# Altium PCB IKIU_UAV.PcbDoc
Units mm, origin at the board's own origin, x right, y up, seen from the top; angles counter-clockwise.
Board outline 69.98 x 70 mm, 2 copper layers (Top Layer, Bottom Layer); 43 components, 52 nets, 188 pads, 41 vias.
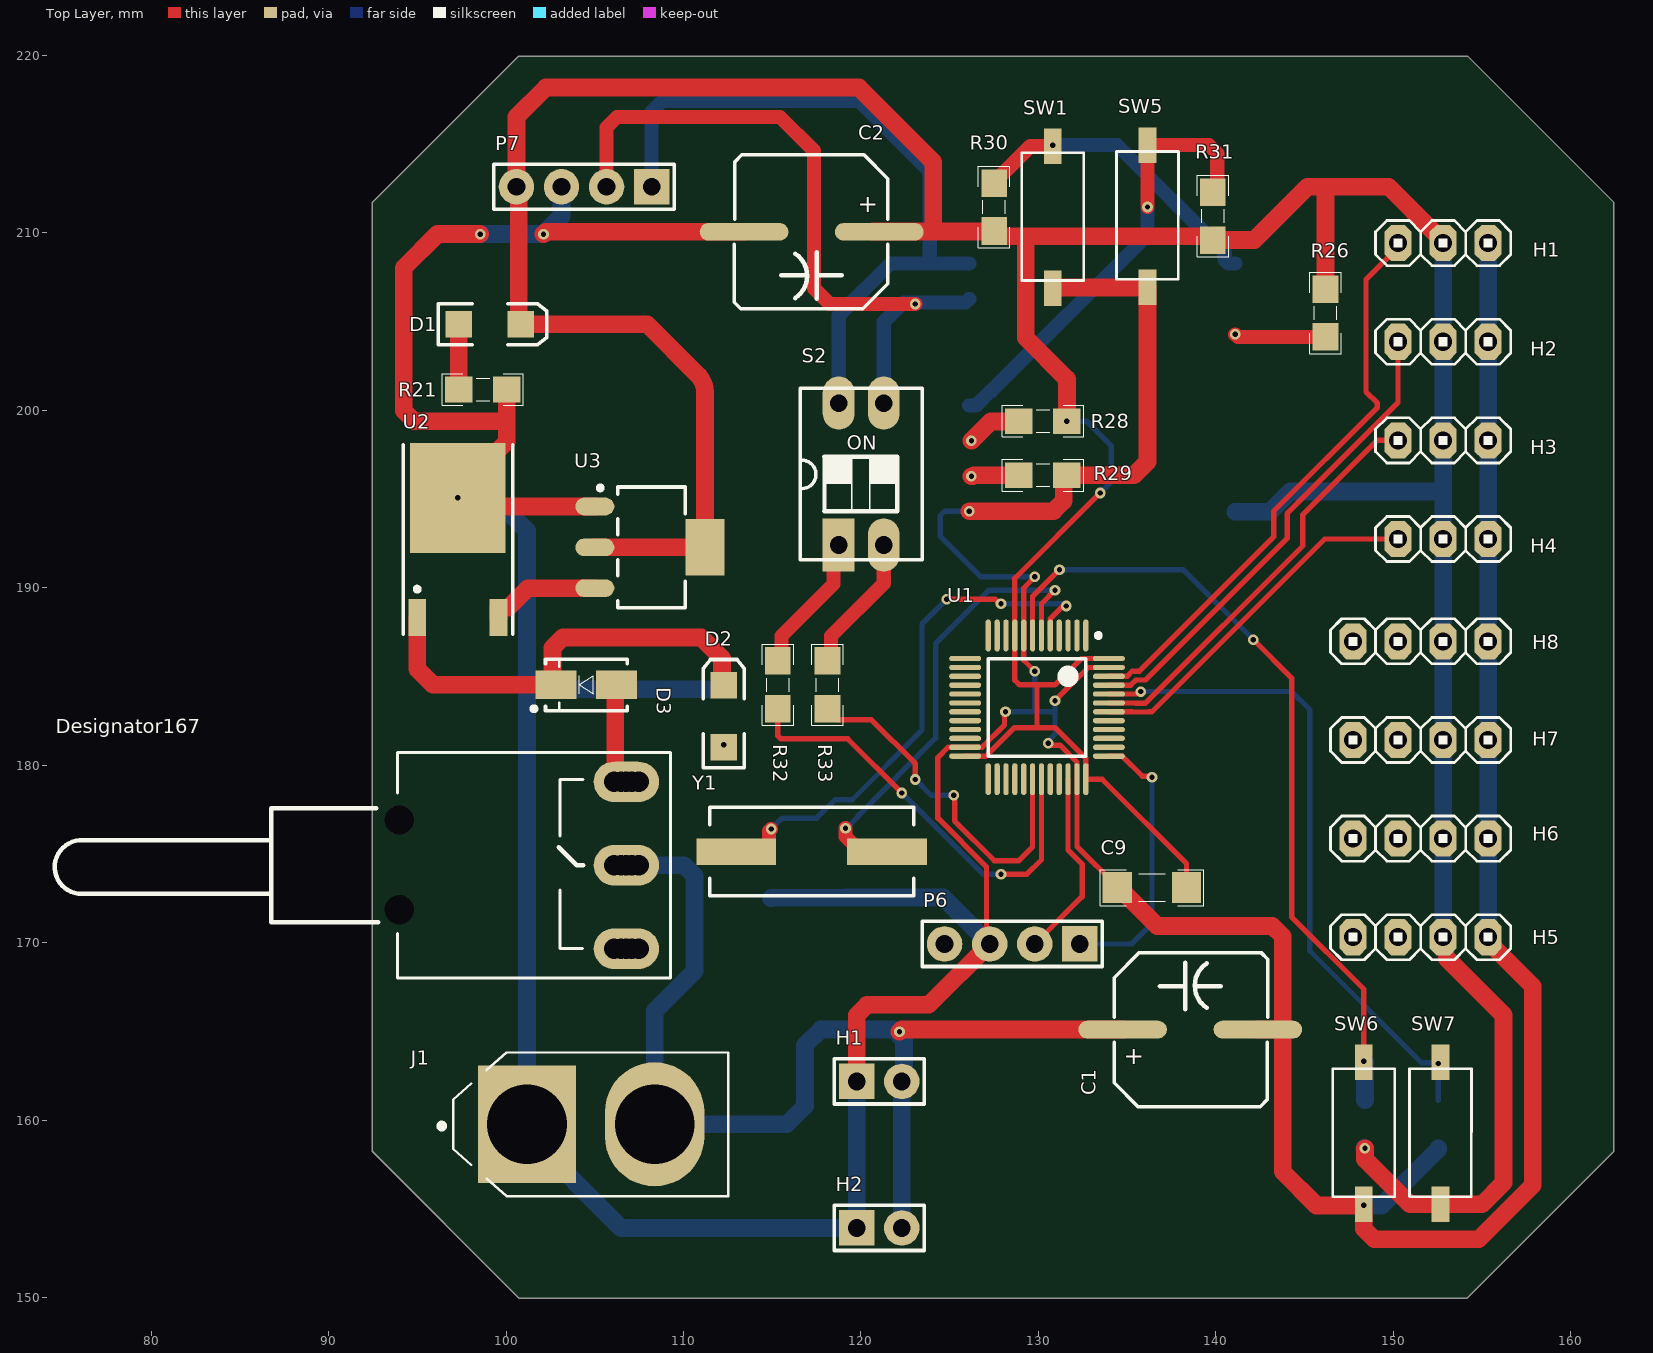
[diagram p0: Top Layer view]
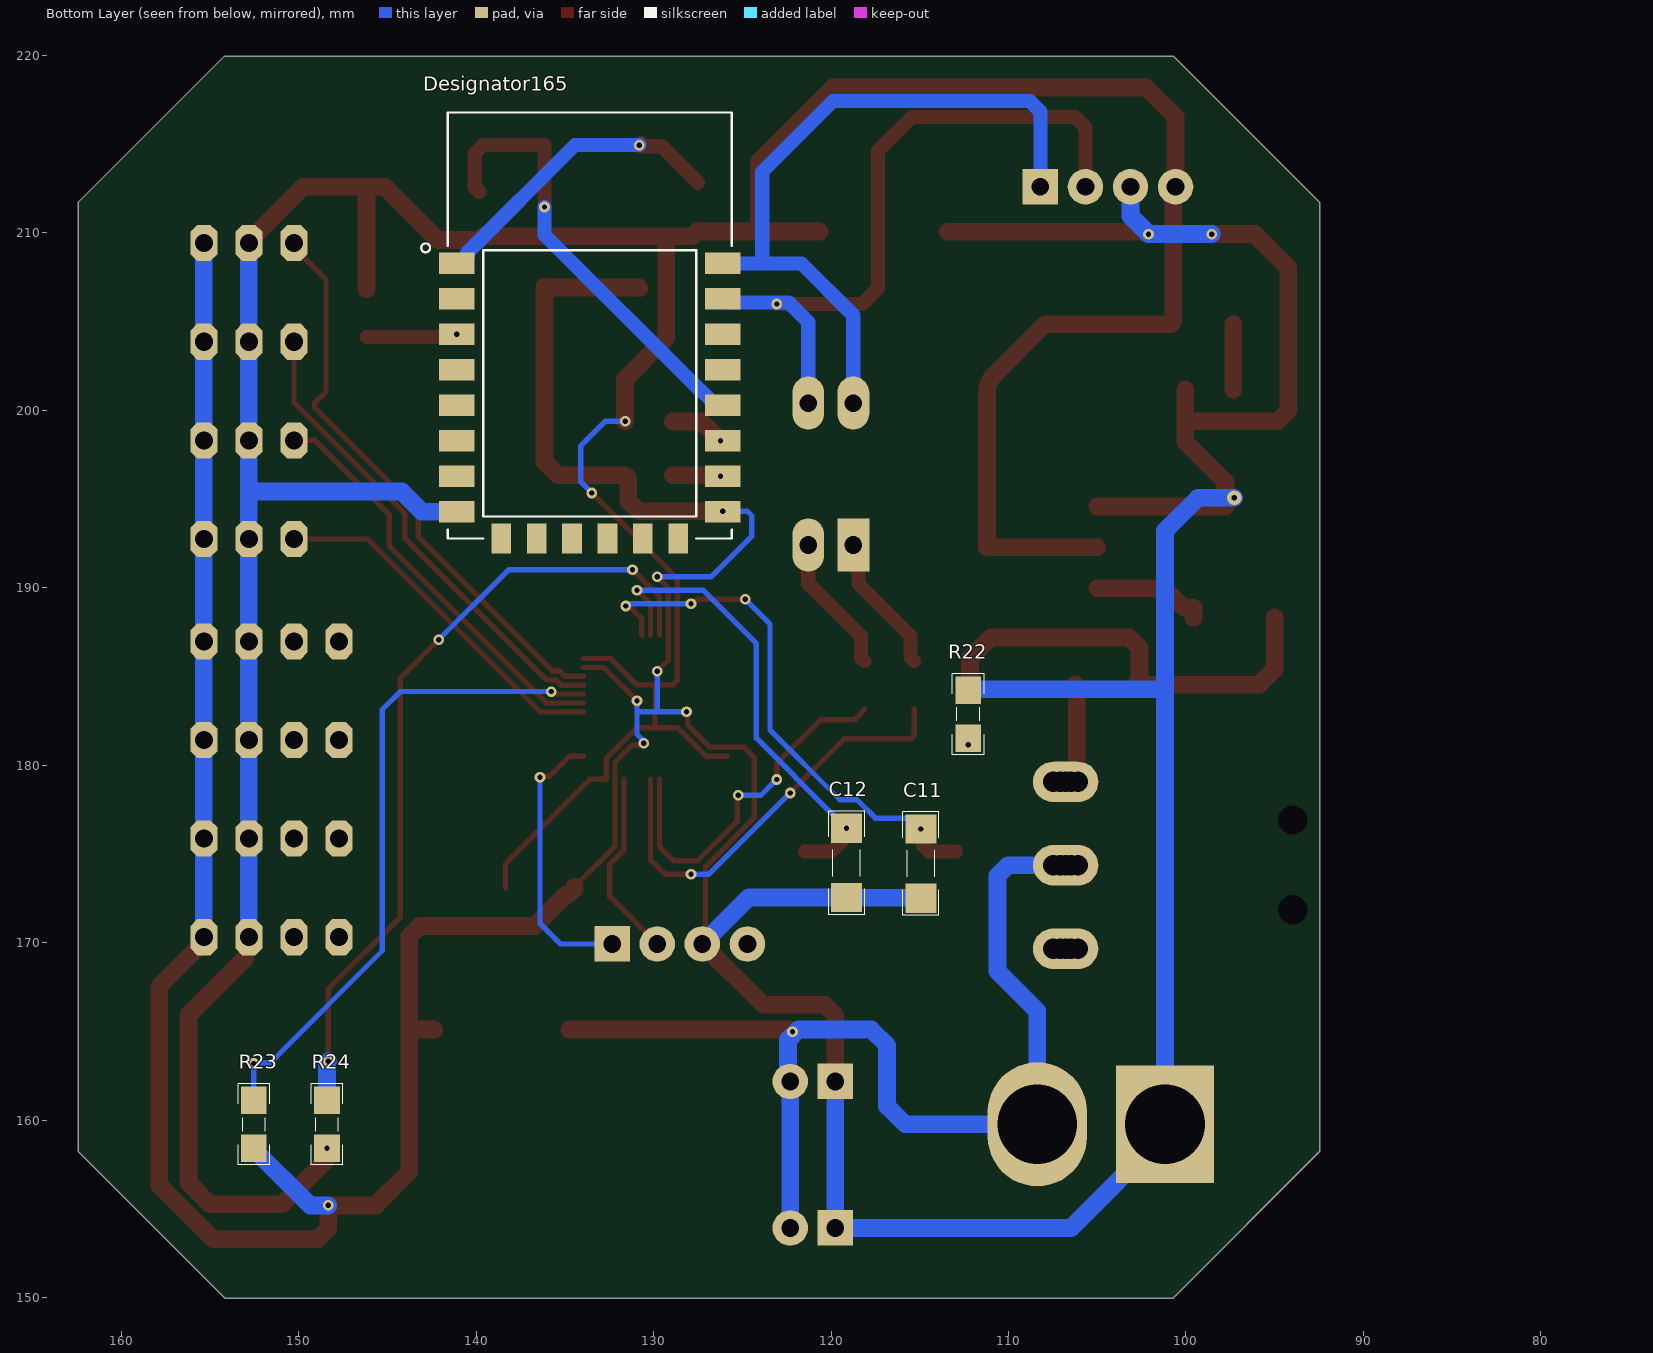
[diagram p1: Bottom Layer view, seen from below]
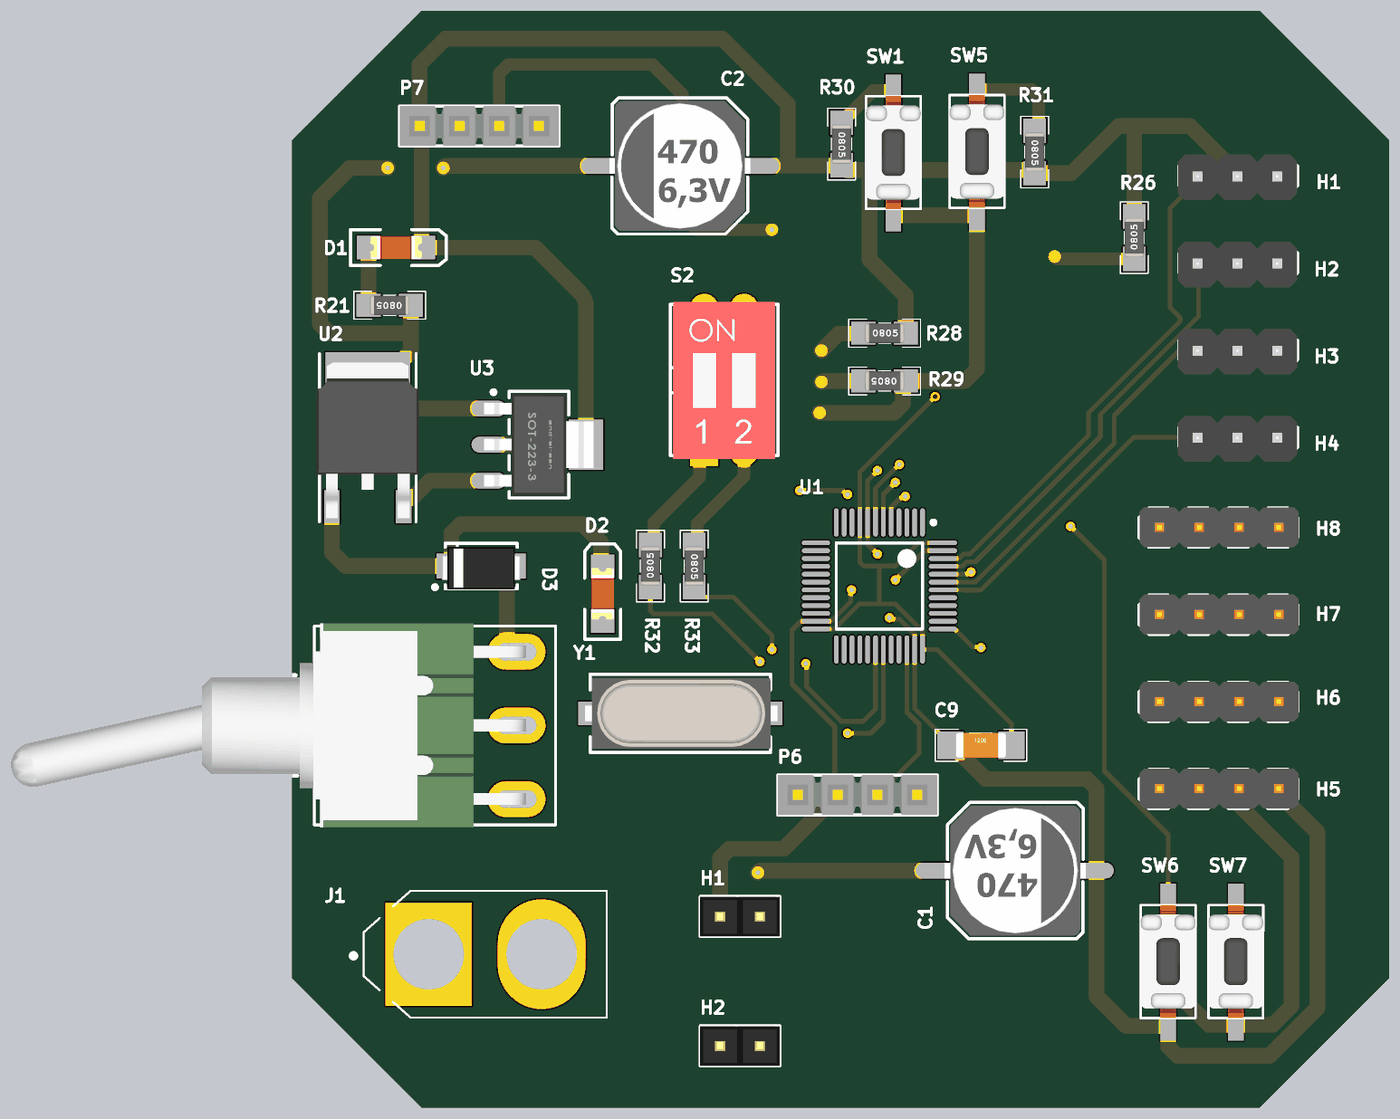
[diagram p2: 3D render of the assembled board from above, using the file's embedded part models]
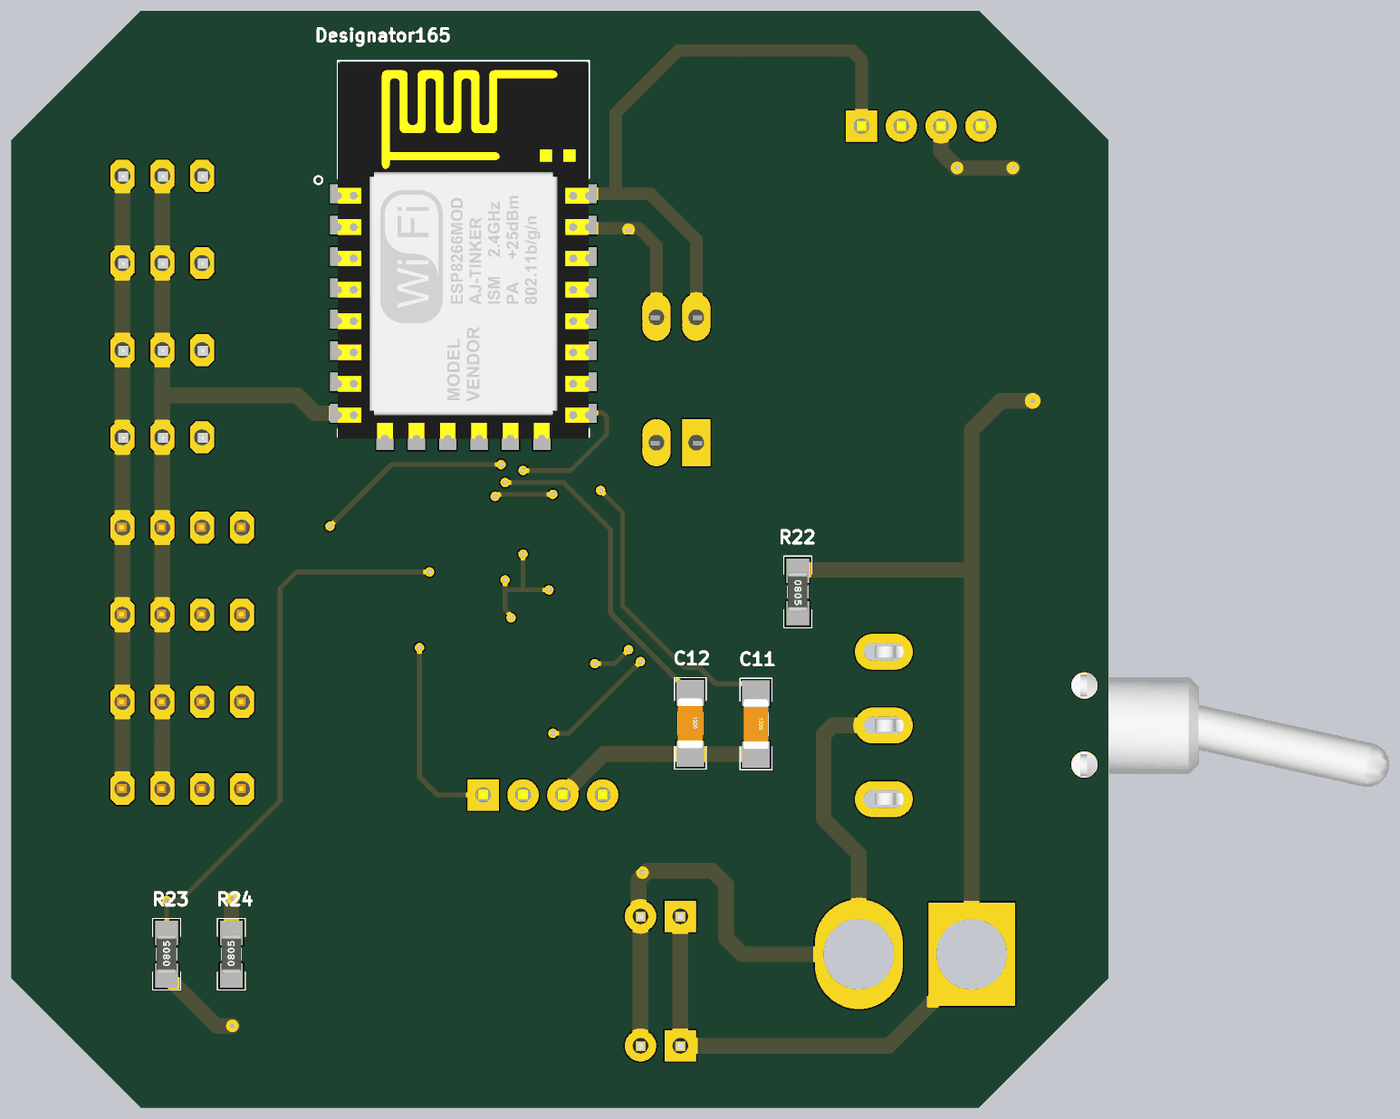
[diagram p3: 3D render of the assembled board from below, using the file's embedded part models]

## Layer stack, top to bottom
Top Solder: solder mask 0.0102, Solder Resist, Dk 3.5
Top Layer: signal copper 0.0356
Dielectric 1: dielectric 0.32, FR-4, Dk 4.8
Bottom Layer: signal copper 0.0356
Bottom Solder: solder mask 0.0102, Solder Resist, Dk 3.5

## Board outline
92.456,158.242 92.456,211.709 100.711,219.964 154.178,219.964 162.433,211.709 162.433,158.242 154.155,149.964 100.734,149.964

## Design rules (kind name [scope] priority, off if disabled: settings)
Clearance [All] p1: gap=0.2 ignorepadtopadclearanceinfootprint=FALSE
PolygonConnect [All] p1: connectstyle=Relief reliefconductorwidth=0.254 reliefentries=4 polygonreliefangle="90 Angle" airgapwidth=0.254
RoutingVias [All] p1: holewidth=0.3 width=0.8 viastyle="Through Hole" minholewidth=0.1 minwidth=0.1 maxholewidth=10 maxwidth=10
SolderMaskExpansion [All] p1: expansion=0.102 istentingtop=FALSE
Width [All] p1: maxlimit=10 minlimit=0.1 preferedwidth=0.8
30 further rules are at their usual default settings.

## Components (designator, comment, footprint, x,y, rotation, side; value= is the part's Value field where it differs from the comment)
C1 "Comment" "CAP SMD 470uF" 138.557,165.1 r180 top
C2 "Comment" "CAP SMD 470uF" 117.221,210.058 r0 top
C9 "0.1uF" CAPC4817X12N 136.398,173.101 r0 top
C11 "0.1uF" CAPC4817X12N 114.935,174.453 r270 bottom
C12 "0.1uF" CAPC4817X12N 119.126,174.498 r270 bottom
D1 "SMD 1206 LED" "LED 1206" 99.088,204.851 r0 top
D2 "SMD 1206 LED" "LED 1206" 112.268,182.759 r90 top
D3 "1n4007" DIOM4629X24N 104.521,184.531 r180 top
Designator165 "Comment" XCVR_ESP8266-12E/ESP-12E 133.597,201.28 r180 bottom
Designator167 "Comment" "Switch SPDT - 500x270x1100x185 mil - Right Angle" 106.78,174.362 r180 top
H1 "Comment" HDR1X2 119.761,162.179 r0 top
H1 "Comment" My_1X03 152.808,209.423 r0 top
H2 "Comment" HDR1X2 119.761,153.924 r0 top
H2 "Comment" My_1X03 152.808,203.864 r0 top
H3 "Comment" My_1X03 152.808,198.305 r0 top
H4 "Comment" My_1X03 152.808,192.746 r0 top
H5 "Comment" My_1X04 151.538,170.307 r0 top
H6 "Comment" My_1X04 151.538,175.866 r0 top
H7 "Comment" My_1X04 151.538,181.425 r0 top
H8 "Comment" My_1X04 151.538,186.984 r0 top
J1 "XT60-M" *AMASS_XT60-M 104.775,159.766 r0 top
P6 "Header 4" HDR1X4 132.334,169.926 r180 top
P7 "Header 4" HDR1X4 108.204,212.598 r180 top
R21 "1K" RESC3413X04N 98.688,201.168 r180 top
R22 "1K" RESC3413X04N 112.268,182.88 r270 bottom
R23 "1K" RESC3413X04N 152.527,159.766 r90 bottom
R24 "1K" RESC3413X04N 148.399,159.766 r90 bottom
R26 "1K" RESC3413X04N 146.177,205.486 r90 top
R28 "1K" RESC3413X04N 130.255,199.39 r0 top
R29 "1K" RESC3413X04N 130.255,196.342 r180 top
R30 "1K" RESC3413X04N 127.508,211.455 r270 top
R31 "1K" RESC3413X04N 139.827,210.947 r270 top
R32 "1K" RESC3413X04N 115.316,184.531 r90 top
R33 "1K" RESC3413X04N 118.11,184.531 r270 top
S2 "DS2" "DIP Switch x2" 118.745,192.405 r0 top
SW1 "Comment" PUSH_SMD_2PIN 130.81,210.883 r90 top
SW5 "Comment" PUSH_SMD_2PIN 136.144,210.947 r90 top
SW6 "Comment" PUSH_SMD_2PIN 148.336,159.258 r90 top
SW7 "Comment" PUSH_SMD_2PIN 152.654,159.258 r90 top
U1 "Comment" STM-LQFP48_N 129.921,183.261 r270 top locked
U2 "Comment" TO-252 97.282,191.697 r0 top
U3 "3V3" SOT223 108.204,192.278 r0 top (schematic designator UP1)
Y1 "12 MHz" "Crystal SMD" 117.221,175.133 r180 top

## Footprints (in the part's own frame and the unit in brackets; to place one, negate y for a bottom-side part, rotate by r counter-clockwise, add the part's x,y. Pads: shape width x height; smd on the part's side, far side on the other; paste and mask are expansions set on the pad)
*AMASS_XT60-M [mm]
  rect 5.516x6.6 hole 4.5: 1(-3.6,0)
  oval 5.6x7 hole 4.5: 2(3.6,0)
  silkscreen extent -8.55,-4.05 7.75,4.05
"CAP SMD 470uF" [mm] "SMD CAP 470uF"
  oval 5x1 smd: 1(3.81,0) 2(-3.81,0)
  silkscreen extent -4.37,-4.34 4.29,4.34, body extent -4.53,-4.15 4.47,4.15, height 12
CAPC4817X12N [mm] "Chip Capacitor, 2-Leads, Body 4/80x1/70mm, IPC Medium Density-Design:Abbas Basereh"
  rect 1.65x1.75 smd: 1(-1.95,0) 2(1.95,0)
  silkscreen extent -2.92,-1.02 2.92,1.02, body extent -1.6,-0.8 1.6,0.8, height 1
"Crystal SMD" [mm] "DESIGNER ABBAS BASEREH"
  rect 4.5x1.5 smd: 1(-4.25,0) 2(4.25,0)
  silkscreen extent -5.75,-2.5 5.75,2.5, body extent -6.21,-2.25 6.09,2.25, height 5.18
DIOM4629X24N [mm] "Molded Diode, 2-Leads, Body 4/60x2/90mm, IPC Medium Density-Design:Abbas Basereh"
  rect 2.3x1.6 smd: 1(-1.7,0) 2(1.7,0)
  silkscreen extent -2.3,-1.45 3.07,1.47, body extent -2.5,-1.22 2.5,1.48, height 2.2
"DIP Switch x2" [mm] "Switch DIP 2 way flat slide Thru-Hole-Design:Ali Hafizi"
  rect 1.8x3 hole 1: 1(0,0)
  oval 1.8x3 hole 1: 2(2.54,0) 3(2.54,8) 4(0,8)
  silkscreen extent -2.16,-0.82 4.71,8.83, body extent -1.98,-1.03 4.52,8.97, height 6.91
HDR1X2 [mm] "Connector; Header; 2 Position"
  rect 2x2 hole 1: 1(0,0)
  round 2 hole 1: 2(2.54,0)
  silkscreen extent -1.27,-1.27 3.81,1.27, body extent -1.27,-1.28 3.81,1.26, height 8.79
HDR1X4 [mm] "Connector; Header; 4 Position"
  rect 2x2 hole 1: 1(0,0)
  round 2 hole 1: 2(2.54,0) 3(5.08,0) 4(7.62,0)
  silkscreen extent -1.27,-1.27 8.89,1.27, body extent -1.27,-1.28 8.89,1.26, height 8.38
"LED 1206" [mm]
  rect 1.5x1.5 smd: 1(-1.75,0) 2(1.75,0)
  silkscreen extent -2.9,-1.15 3.2,1.15, body extent -1.65,-0.72 1.65,0.73, height 1.36
My_1X03 [mil]
  oct 60x80 hole 40: 1(-100,0) 2(0,0) 3(100,0)
  silkscreen extent -150,-50 150,50, body extent -152,-61 148,54, height 335
My_1X04 [mil]
  oct 60x80 hole 40: 1(-150,0) 2(-50,0) 3(50,0) 4(150,0)
  silkscreen extent -200,-50 200,50, body extent -198,-49 202,51, height 234
PUSH_SMD_2PIN [mm]
  rect 2x1 smd: 1(-4,0) 2(4,0)
  silkscreen extent -3.57,-1.75 3.63,1.75, body extent -3.56,-1.75 3.63,1.75, height 5
RESC3413X04N [mm] "Chip Resistor, 2-Leads, Body 3/40x1/30mm, IPC Medium Density-Design:Abbas Basereh"
  rect 1.55x1.45 smd: 1(-1.35,0) 2(1.35,0)
  silkscreen extent -2.29,-0.89 2.29,0.89, body extent -1.25,-0.62 1.25,0.62, height 0.79
SOT223 [mm] "SOT223, 4-Leads, Body 6.5x3.5mm, Pitch 2.30mm-Designer Abbas Basereh"
  oval 2.2x1 smd: 1(-3.2,2.3) 2(-3.2,0) 3(-3.2,-2.3)
  rect 2.2x3.2 smd: 4(3,0)
  Top Layer pour cut-out: -1.7,3.556 1.7,3.556 1.7,-3.556 -1.7,-3.556
  silkscreen extent -3.02,-3.4 1.9,3.47, body extent -3.5,-3.25 3.5,3.25, height 1.7
STM-LQFP48_N [mm] "QFP, 48-Leads, Body 7x7mm, Pitch 0.5mm, IPC Medium Density"
  oval 1.8x0.3 smd: 1(-4.05,2.75) 2(-4.05,2.25) 3(-4.05,1.75) 4(-4.05,1.25) 5(-4.05,0.75) 6(-4.05,0.25) 7(-4.05,-0.25) 8(-4.05,-0.75) 9(-4.05,-1.25) 10(-4.05,-1.75) 11(-4.05,-2.25) 12(-4.05,-2.75) 25(4.05,-2.75) 26(4.05,-2.25) 27(4.05,-1.75) 28(4.05,-1.25) 29(4.05,-0.75) 30(4.05,-0.25) 31(4.05,0.25) 32(4.05,0.75) 33(4.05,1.25) 34(4.05,1.75) 35(4.05,2.25) 36(4.05,2.75)
  oval 0.3x1.8 smd: 13(-2.75,-4.05) 14(-2.25,-4.05) 15(-1.75,-4.05) 16(-1.25,-4.05) 17(-0.75,-4.05) 18(-0.25,-4.05) 19(0.25,-4.05) 20(0.75,-4.05) 21(1.25,-4.05) 22(1.75,-4.05) 23(2.25,-4.05) 24(2.75,-4.05) 37(2.75,4.05) 38(2.25,4.05) 39(1.75,4.05) 40(1.25,4.05) 41(0.75,4.05) 42(0.25,4.05) 43(-0.25,4.05) 44(-0.75,4.05) 45(-1.25,4.05) 46(-1.75,4.05) 47(-2.25,4.05) 48(-2.75,4.05)
  silkscreen extent -4.17,-2.75 2.75,3.58, body extent -3.5,-3.5 3.5,3.5, height 1.6
"Switch SPDT - 500x270x1100x185 mil - Right Angle" [mil]
  round 90 hole 45: 1(-27.56,-185.04) 1(-11.81,-185.04) 1(11.81,-185.04) 1(27.56,-185.04) 2(-27.56,0) 2(-11.81,0) 2(11.81,0) 2(27.56,0) 3(-27.56,185.04) 3(-11.81,185.04) 3(11.81,185.04) 3(27.56,185.04)
  oval 140x90 hole 45: 1(0,-185) 2(0,0) 3(0,185)
  round 63 hole 65: MH(503.94,-100.36) MH(503.94,98.43)
  silkscreen extent -98,-250 1268,250, body extent -23,-256 1269,256, height 317
TO-252 [mm] "D-PAK/TO-252-AA; 3 Leads (1 Cropped); Body 10.1 (inc. leads) x 6.6 mm (LxW max)"
  rect 1x2.1 smd: 1(-2.285,-3.375) 3(2.285,-3.375)
  rect 5.4x6.2 smd: 4(0,3.375)
  silkscreen extent -3.08,-4.32 3.09,6.38, body extent -3.27,-4.11 3.27,5.83, height 2.39
XCVR_ESP8266-12E/ESP-12E [mm]
  rect 2x1.2 smd: 1(-7.5,7) 2(-7.5,5) 3(-7.5,3) 4(-7.5,1) 5(-7.5,-1) 6(-7.5,-3) 7(-7.5,-5) 8(-7.5,-7) 15(7.5,-7) 16(7.5,-5) 17(7.5,-3) 18(7.5,-1) 19(7.5,1) 20(7.5,3) 21(7.5,5) 22(7.5,7)
  rect 1.1x1.7 smd: 9(-5,-8.5) 10(-3,-8.5) 11(-1,-8.5) 12(1,-8.5) 13(3,-8.5) 14(5,-8.5)
  silkscreen extent -9.5,-8.5 8,15.5, body extent -8,-8.63 8.01,15.38, height 2.65

## Part data
C9 C11 C12: library part "CAP SMD 1206", "CAP 1206", Data=16-12-2016, Desc.="CAP SMD 1206", Designer="Abbas Basereh"
D1 D2: library part "LED SMD 1206"
D3: library part "1n4007 SMD M7", "Standard Rectifiers", Manufacturer="DC COMPONENTS", Data=16-12-2016, Designer="Abbas Basereh", Link=http://www.tme.eu/en/details/m7/smd-universal-diodes/dc-components/, Part. No=M7
J1: "Plug; DC supply; XT60; male; PIN: 2; for cable; soldered; 30A; 500V", Package="Package Analog Devices", Availability=Unavailable, MF=AMASS, MP=XT60-M, Price=None, SnapEDA_Link=https://www.snapeda.com/parts/XT60-M/AMASS/view-part/2883912/?ref=snap
P6 P7: "Header, 4-Pin", LatestRevisionDate=17-Jul-2002, LatestRevisionNote="Re-released for DXP Platform.", Publisher="Altium Limited"
R21 R22 R23 R24 R26 R28 R29 R30 R31 R32 R33: library part "RES 0805 0.125W", "RES 0805", Data=16-12-2016, Desc.="RES SMD 0805", Designer="Abbas Basereh"
S2: library part "DIP Switch 2", "2 BIT DIP Switch"
U3: library part AMS1117-x.x, "x.x Volt, 800mA Low-Dropout Linear Regulator, 4-pin SOT-223", Data=16-12-2016, Designer="Ali Hafizi"
Y1: library part XTAL, "XTAL Crystal", ComponentLink1Description=Datasheet, ComponentLink2Description=Reference, Design Date=2017-1-3, Designer="ABBAS BASEREH", Mounting Technology="Surface Mount\Through-Hole", Status=Unreleased

## Via types
v1: diameter 0.6, hole 0.3, Top Layer to Bottom Layer, 39 vias
v2: diameter 0.8, hole 0.3, Top Layer to Bottom Layer, 2 vias

## Nets (pads, with @x,y where several pads share a name; then routed paths per layer and width w, separated by ;. In a path a pad name is that pad's centre, name@x,y a point inside that pad or via, vN(x,y) a via of type N, cw(c..) or ccw(c..) an arc to the next point about the centre after c; other vN are vias at no path point)
+5: U2.3 U3.3 | length 6.4
  Top Layer w1: U2.3 99.567,188.872 100.117,188.872 101.223,189.978 U3.3
+12: C1.1 Designator167.2 H1.2@122.301,162.179 H2.2@122.301,153.924 J1.2 | length 61.5
  Top Layer w1: v1(122.174,164.973) 122.301,165.1 C1.1
  Bottom Layer w1: Designator167.2@106.08,174.362 106.48,174.362 106.78,174.362 107.08,174.362 107.48,174.362 110.031,174.362 110.617,173.776 110.617,168.395 108.375,166.153 J1.2 115.824,159.766 116.84,160.782 116.84,164.211 117.729,165.1 121.842,165.1 122.428,164.514 122.428,162.306 122.301,162.179 H2.2@122.301,153.924
ADC1: 
ADC4: 
ADC5: 
ADC6: 
ADC7: 
ADC8: 
ADC9: 
BOOT0: R23.2 SW7.2 U1.44 | length 37.3
  Top Layer w0.3: U1.44 135.543,184.011 135.682,184.15 v1(135.763,184.15)
  Bottom Layer w0.3: v1(135.763,184.15) 144.272,184.15 145.288,183.134 145.288,169.545 151.598,163.235 152.487,163.235 v1(152.527,163.195) R23.2
ESP_BOOT: Designator165.18 R31.1 SW5.2 | length 25.5
  Top Layer w0.8: v1(136.144,211.455) SW5.2 139.611,214.947 140.08,214.478 140.08,212.55 R31.1
  Bottom Layer w0.8: Designator165.18 126.497,200.28 127.297,201.08 127.346,201.08 136.144,209.878 v1(136.144,211.455)
ESP_RST: Designator165.1 R30.1 SW1.2 | length 17.7
  Top Layer w0.8: R30.1 127.508,212.855 129.536,214.883 SW1.2 v1(130.81,214.946) SW1.2@130.71,215.046
  Bottom Layer w0.8: v1(130.81,214.946) 134.431,214.946 140.497,208.88 140.497,208.48 140.697,208.28 Designator165.1
ESP_RX: Designator165.21 P7.2 S2.3 | length 39.8
  Top Layer w0.8: P7.2 105.664,215.939 106.26,216.535 115.443,216.535 117.348,214.63 117.348,206.883 117.856,206.375 118.237,205.994 v1(123.063,205.994)
  Bottom Layer w0.8: S2.3 121.285,204.978 122.387,206.08 125.897,206.08 Designator165.21
ESP_TX: Designator165.22 P7.1 S2.4 | length 40.5
  Bottom Layer w0.8: P7.1 108.204,216.828 108.8,217.424 119.888,217.424 123.881,213.431 123.881,208.28 ; S2.4 118.745,205.359 121.666,208.28 123.881,208.28 ; Designator165.22 123.881,208.28
GND: C1.2 C2.2 C9.1 C11.2 C12.2 Designator165.15 H1.1@119.761,162.179 H1.3 H2.1@119.761,153.924 H2.3 H3.3 H4.3 H5.4 H6.4 H7.4 H8.4 J1.1 P6.3 P7.3 R21.1 R22.1 R23.1 R29.1 SW1.1 SW5.1 SW6.1 U1.8 U1.23 U1.35 U1.47 U2.4 U3.1 | length 341.3
  Top Layer w0.3: P6.3 127.074,170.106 127.074,174.274 124.333,177.015 124.333,180.43 124.914,181.011 U1.23 126.828,181.011 128.086,182.268 128.086,182.95 v1(128.143,183.007) ; v1(129.794,185.293) 129.171,185.916 U1.8 129.171,189.977 129.794,190.6 v1(129.794,190.627) ; v1(130.556,181.229) 130.652,181.133 131.206,181.133 132.171,180.168 U1.35 132.171,175.428 C9.1@134.448,173.151 ; v1(130.937,183.642) 132.806,185.511 U1.47
  Top Layer w1: v1(98.552,209.931) 96.139,209.931 94.234,208.026 94.234,199.976 94.82,199.39 100.038,199.39 ; R21.1 100.038,199.39 ; v1(102.108,209.931) 102.235,210.058 C2.2 ; U3.1 97.776,194.578 97.776,195.966 100.038,198.228 100.038,199.39 ; v1(119.761,162.179) 119.761,165.911 120.347,166.497 123.825,166.497 P6.3 ; v1(126.111,194.31) 130.844,194.31 131.43,194.896 131.43,196.167 R29.1 135.382,196.342 136.144,197.104 SW5.1 136.112,206.915 130.842,206.915 SW1.1 ; C9.1@134.448,173.151 134.448,173.051 134.773,172.726 134.912,172.726 136.696,170.942 143.178,170.942 143.764,170.356 C1.2@143.764,165.1 ; v1(155.348,170.307) 155.348,170.053 157.861,167.54 157.861,156.337 154.813,153.289 148.922,153.289 148.336,153.875 v1(148.336,155.194) 145.669,155.194 143.764,157.099 C1.2@143.764,165.1 ; C1.2@143.764,165.1 C1.2 C1.2@143.764,165.1
  Bottom Layer w0.3: v1(126.111,194.31) 124.714,194.31 124.46,194.056 124.46,192.907 126.74,190.627 v1(129.794,190.627) ; v1(128.143,183.007) 129.794,183.007 ; v1(129.794,185.293) 129.794,183.007 ; v1(130.556,181.229) 130.556,181.364 130.937,181.745 130.937,183.007 ; v1(130.937,183.642) 130.937,183.007 ; 129.794,183.007 130.937,183.007
  Bottom Layer w1: v2(97.282,195.072) 99.314,195.072 101.175,193.211 101.175,184.28 ; v1(98.552,209.931) v1(102.108,209.931) 103.124,210.947 P7.3 ; R22.1@112.218,184.28 101.175,184.28 ; C11.2 114.958,172.526 119.104,172.526 C12.2 124.632,172.548 P6.3 ; v1(119.761,162.179) 119.761,153.924 106.475,153.924 101.175,159.224 J1.1 101.175,184.28 ; v1(148.336,155.194) 149.355,155.194 152.527,158.366 R23.1 ; H5.4@155.348,170.053 v1(155.348,170.307) ; H5.4@155.348,170.588 H6.4 ; H6.4@155.348,175.916 H7.4 ; H7.4@155.348,181.524 H8.4 ; H8.4@155.348,187.111 H4.3 H3.3 H2.3 H1.3
I2C_SCL: 
I2C_SDA: 
INA1: 
INA2: 
INA3: 
INA4: 
INB1: 
INB2: 
INB3: 
INB4: 
LED1: 
LED2: 
MOTORS_EN: 
NetD1_1: D1.1 R21.2 | length 3.7
  Top Layer w1: R21.2 D1.1
NetD2_1: D2.1 R22.2
  other v2: 112.268,181.155
NetD3_1: D3.1 Designator167.1 | length 5.7
  Top Layer w1: D3.1 106.15,184.46 106.15,179.132 106.08,179.062 Designator167.1@106.229,178.913
NetD5_1: P6.4
NetR26_1: Designator165.3 R26.1 | length 5.1
  Top Layer w0.8: v1(141.097,204.28) 141.241,204.136 R26.1
NetR28_1: Designator165.17 R28.1 | length 3.1
  Top Layer w1: v1(126.224,198.28) 127.309,199.365 128.88,199.365 R28.1
NetR29_2: Designator165.16 R29.2 | length 2.7
  Top Layer w1: v1(126.224,196.28) 126.303,196.28 126.365,196.342 R29.2
NetR32_2: R32.2 S2.1 | length 7.9
  Top Layer w0.8: R32.2 115.52,186.085 115.52,187.275 118.449,190.204 118.449,192.109 S2.1
NetR33_1: R33.1 S2.2 | length 7.8
  Top Layer w0.8: R33.1 118.314,186.085 118.314,187.275 121.285,190.246 S2.2
NRST: R24.2 SW6.2 U1.7 | length 45.5
  Top Layer w0.3: U1.7 129.671,189.518 131.161,191.008 v1(131.191,191.008) ; v1(142.113,187.071) 144.272,184.912 144.272,171.45 148.336,167.386 v1(148.336,163.322)
  Bottom Layer w0.3: v1(131.191,191.008) 138.176,191.008 v1(142.113,187.071)
  Bottom Layer w1: v1(148.336,163.322) 148.399,163.258 R24.2
OSC_IN: C11.1 U1.5 Y1.2 | length 30.8
  Top Layer w0.3: v1(124.841,189.357) 127.554,189.357 127.808,189.103 v1(127.889,189.103) ; U1.5 130.671,188.268 131.321,188.919 131.515,188.919 v1(131.572,188.976)
  Top Layer w0.8: Y1.2 114.471,175.133 114.821,175.483 114.821,176.289 v1(114.935,176.403)
  Bottom Layer w0.3: C11.1@114.985,176.403 v1(114.935,176.403) 115.549,177.017 117.5,177.017 118.537,178.054 119.507,178.054 123.444,181.991 123.444,187.96 v1(124.841,189.357) ; v1(127.889,189.103) 131.364,189.103 131.491,188.976 v1(131.572,188.976)
OSC_OUT: C12.1 U1.6 Y1.1 | length 26.6
  Top Layer w0.3: U1.6 130.171,189.099 v1(130.937,189.865)
  Top Layer w0.8: v1(119.126,176.448) 119.126,175.978 119.971,175.133 Y1.1
  Bottom Layer w0.3: v1(119.126,176.448) 119.176,176.448 119.851,177.123 119.851,177.173 124.206,181.528 124.206,186.862 127.209,189.865 v1(130.937,189.865)
PWM1: H4.1 U1.42 | length 20.3
  Top Layer w0.3: U1.42 135.276,183.011 135.287,183 136.239,183 136.25,183.011 136.402,183.011 146.137,192.746 H4.1
PWM2: H3.1 U1.43 | length 23.5
  Top Layer w0.3: U1.43 135.483,183.511 135.494,183.5 136.032,183.5 144.899,192.367 144.899,194.121 149.083,198.305 H3.1
PWM3: H2.1@150.268,203.864 U1.45 | length 27.1
  Top Layer w0.3: U1.45 135.205,184.511 135.494,184.8 136.032,184.8 144.018,192.786 144.018,194.183 150.268,200.433 H2.1@150.268,203.864
PWM4: H1.1@150.268,209.423 U1.46 | length 32.5
  Top Layer w0.3: U1.46 134.998,185.011 135.287,185.3 135.698,185.3 143.256,192.858 143.256,194.31 149.101,200.155 149.101,200.403 148.463,201.041 148.463,207.364 150.268,209.169 H1.1@150.268,209.423
SWCLK: P6.1 U1.37 | length 15.7
  Top Layer w0.3: U1.37 134.721,180.511 135.851,179.381 136.341,179.381 v1(136.398,179.324)
  Bottom Layer w0.3: P6.1 135.255,169.926 136.398,171.069 v1(136.398,179.324)
SWDIO: P6.2 U1.34 | length 10.7
  Top Layer w0.3: P6.2 132.461,172.593 132.461,174.431 131.671,175.221 131.671,178.461 U1.34
UART1_RX: R32.1 U1.31 | length 24.5
  Top Layer w0.3: R32.1 115.316,181.659 115.492,181.483 119.253,181.483 v1(122.301,178.435) ; v1(127.889,173.863) 129.36,173.863 130.171,174.674 U1.31
  Bottom Layer w0.3: v1(122.301,178.435) 126.873,173.863 v1(127.889,173.863)
UART1_TX: R33.2 U1.30 | length 20.6
  Top Layer w0.3: R33.2 118.11,183.131 118.685,182.556 120.593,182.556 123.063,180.086 v1(123.063,179.197) ; v1(125.222,178.308) 125.279,178.251 125.279,176.854 127.511,174.622 128.902,174.622 129.671,175.391 U1.30
  Bottom Layer w0.3: v1(123.063,179.197) 123.952,178.308 v1(125.222,178.308)
UART2_RX: U1.13
UART2_TX: U1.12
VBAT: D2.2 D3.2 U2.1 | length 25.1
  Top Layer w1: U2.1 94.997,185.419 95.885,184.531 D3.2 102.616,184.736 102.616,186.612 103.202,187.198 110.998,187.198 112.167,186.029 112.167,184.61 D2.2
VCC: C2.1 C9.2 D1.2 Designator165.8 H1.2@152.808,209.423 H2.2@152.808,203.864 H3.2 H4.2 H5.3 H6.3 H7.3 H8.3 P7.4 R24.1 R26.2 R28.2 R30.2 R31.2 SW7.1 U1.9 U1.24 U1.36 U1.48 U3.2 U3.4 | length 242.1
  Top Layer w0.3: U1.24 127.044,180.511 128.651,182.118 129.921,182.118 ; v1(133.477,195.342) 128.671,190.536 U1.9 128.671,184.79 128.93,184.531 129.921,184.531 ; U1.48 132.417,186.011 130.937,184.531 129.921,184.531 ; C9.2 138.348,174.453 133.59,179.211 U1.36 132.671,180.384 130.937,182.118 129.921,182.118 ; 129.921,182.118 129.921,184.531
  Top Layer w0.8: v1(152.808,170.307) 153.023,170.092 153.023,169.113
  Top Layer w1: U3.2 U3.4 111.204,201.052 ccw(c109.887,201.052) 110.818,201.983 107.95,204.851 D1.2 100.711,204.978 100.711,212.471 P7.4 100.584,216.535 102.235,218.186 119.888,218.186 124.079,213.995 124.079,210.082 ; C2.1@120.65,210.058 120.674,210.082 124.079,210.082 ; v1(131.605,199.39) 131.605,201.77 129.286,204.089 129.286,209.804 ; 145.161,212.598 142.16,209.597 R31.2 139.62,209.804 129.286,209.804 ; 145.329,212.598 146.177,212.598 ; R26.2 146.177,212.598 ; v1(148.399,158.416) 148.399,157.797 150.939,155.258 155.004,155.258 156.21,156.464 156.21,165.926 153.023,169.113 ; H1.2@152.808,209.423 152.808,209.589 152.458,209.939 152.399,209.939 149.74,212.598 146.177,212.598 ; 124.079,210.082 127.484,210.082 R30.2 127.809,209.804 129.286,209.804
  Bottom Layer w0.3: v1(131.605,199.39) 132.715,199.39 134.112,197.993 134.112,195.977 v1(133.477,195.342)
  Bottom Layer w1: Designator165.8 143.051,194.28 144.194,195.423 152.684,195.423 ; R24.1@148.357,158.363 R24.1@148.357,158.424 ; H5.3@152.808,170.561 H6.3 H7.3 H8.3 ; H8.3@152.808,187.054 H4.2 152.808,195.423 ; 152.808,195.526 H3.2 ; H3.2@152.808,198.398 152.808,203.864 H1.2@152.808,209.423
  other v1: 152.808,209.53
pads on no net: Designator165.2 Designator165.4 Designator165.5 Designator165.6 Designator165.7 Designator165.9 Designator165.10 Designator165.11 Designator165.12 Designator165.13 Designator165.14 Designator165.19 Designator165.20 Designator167.3 Designator167.MH H5.1 H5.2 H6.1 H6.2 H7.1 H7.2 H8.1 H8.2 U1.1 U1.2 U1.3 U1.4 U1.10 U1.11 U1.14 U1.15 U1.16 U1.17 U1.18 U1.19 U1.20 U1.21 U1.22 U1.25 U1.26 U1.27 U1.28 U1.29 U1.32 U1.33 U1.38 U1.39 U1.40 U1.41

## Silkscreen, mask and mechanical layers (free items; w line width, h text height)
Mechanical 1:
  the board outline again, w0.5

## Text inside footprints (layer, text, board x,y; h text height)
C1: Top Overlay "+" at 135.957,164 h1 r180
C2: Top Overlay "+" at 119.821,211.158 h1
S2: Top Overlay "ON" at 119.185,197.765 h0.8